# Altium PCB PCB1.PcbDoc
Units mil, origin at the board's own origin, x right, y up, seen from the top; angles counter-clockwise.
Board outline 3937 x 3937 mil, 2 copper layers (Top Layer, Bottom Layer), stack 60.4 mil thick; 14 components, 30 nets, 254 pads, 16 vias.
Unrouted connection lines stored in the file: 73.
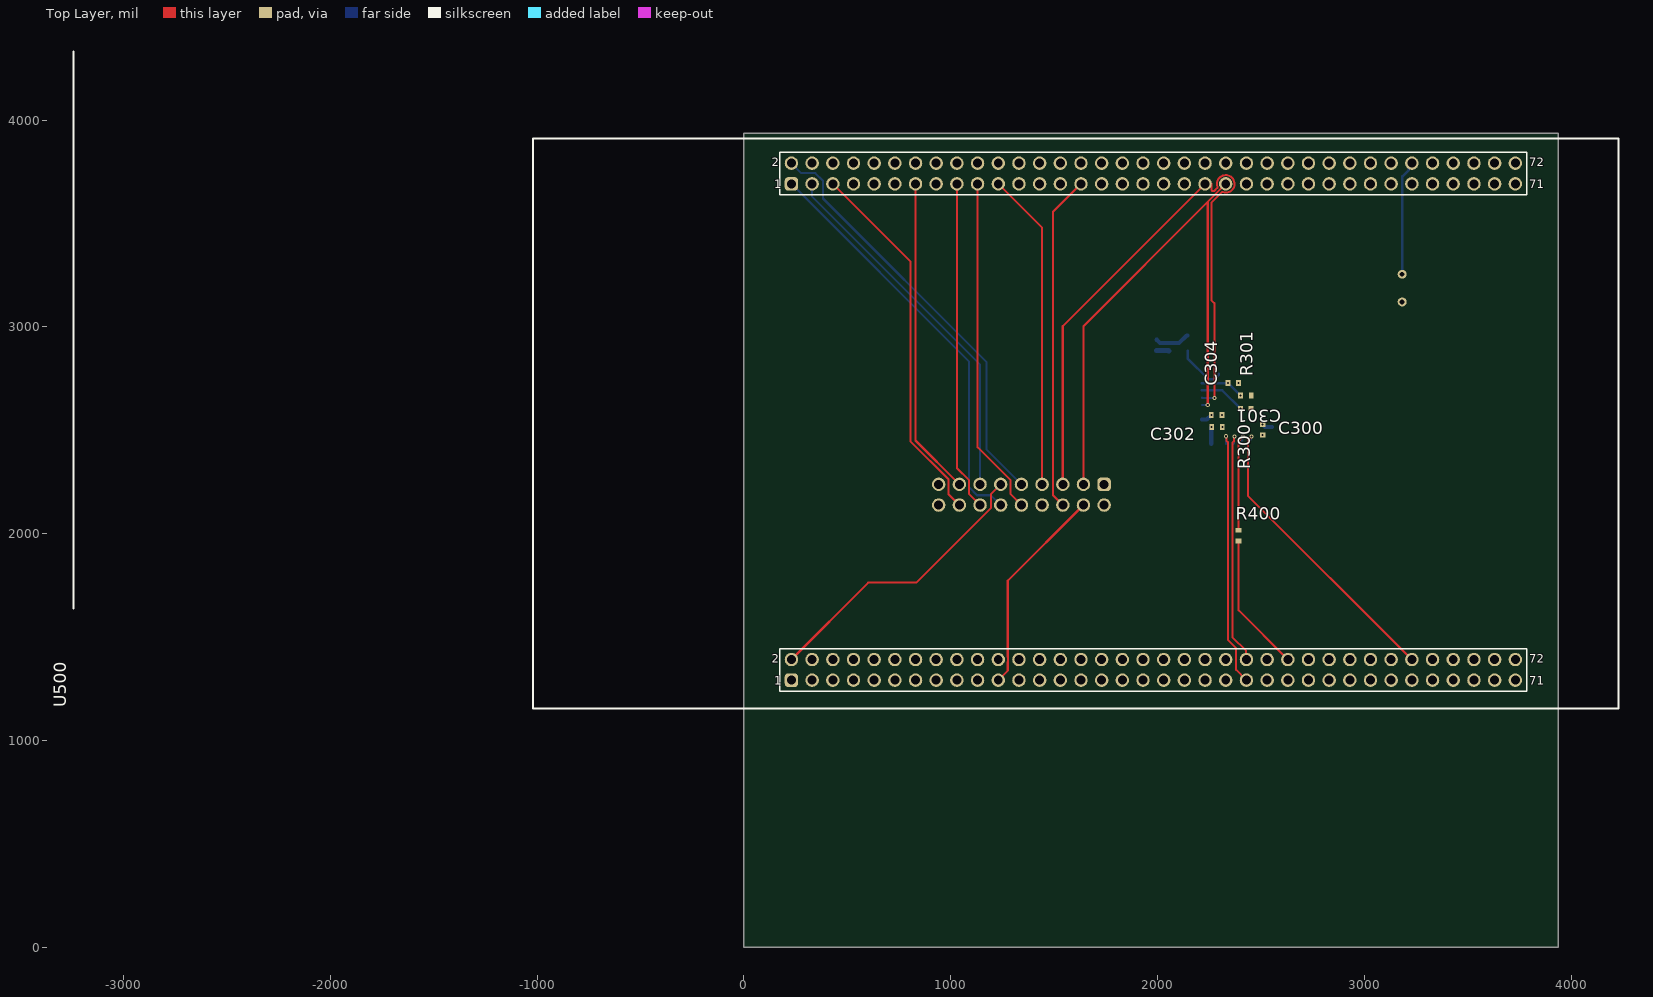
[diagram p0: Top Layer view]
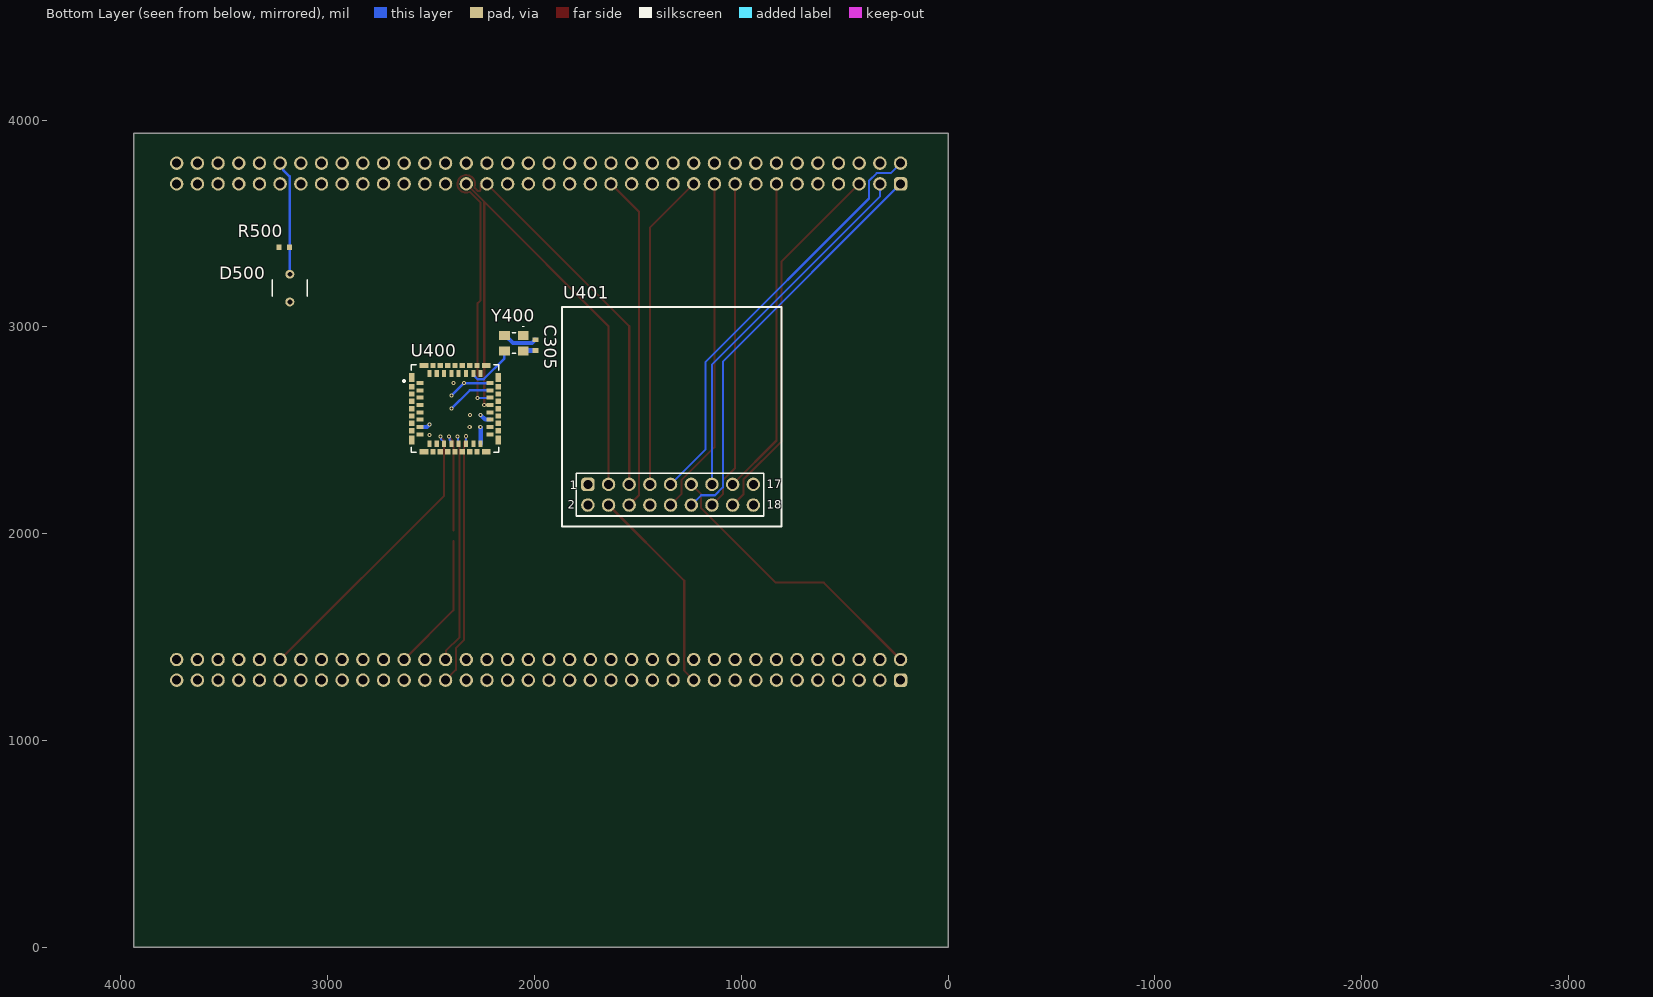
[diagram p1: Bottom Layer view, seen from below]

## Layer stack, top to bottom
Top Solder: solder mask 0.5, Solder Resist, Dk 3.3
Top Layer: signal copper 0.7
Dielectric1: core 59, FR-4, Dk 4.3
Bottom Layer: signal copper 0.7
Bottom Solder: solder mask 0.5, Solder Resist, Dk 3.3

## Board outline
0,0 3937,0 3937,3937 0,3937

## Design rules (kind name [scope] priority, off if disabled: settings)
Clearance [All] p1: gap=5 ignorepadtopadclearanceinfootprint=FALSE
DiffPairsRouting [All] p1: maxlimit=10 minlimit=10 mostfreqgap=10 toplayer_minwidth=10 toplayer_maxwidth=10 toplayer_prefwidth=10 bottomlayer_minwidth=10 bottomlayer_maxwidth=10 bottomlayer_prefwidth=10 maxuncoupledlength=500
HoleSize [All] p1: absolutevalues=TRUE maxlimit=300 minlimit=10 maxpercent=80.000 minpercent=20.000
MinimumAnnularRing [All] p1: minimumring=10
PasteMaskExpansion [All] p1: expansion=10
PlaneClearance [All] p1: clearance=15
PlaneConnect [All] p1: pad.planeconnectstyle=Relief pad.reliefexpansion=20 pad.reliefentries=4 pad.reliefconductorwidth=10 pad.reliefairgap=10 via.planeconnectstyle=Direct via.reliefexpansion=20 via.reliefentries=4 via.reliefconductorwidth=10 via.reliefairgap=10
PolygonConnect [All] p1: thpad.connectstyle=Relief thpad.reliefconductorwidth=10 thpad.reliefentries=4 thpad.polygonreliefangle="90 Angle" thpad.airgapwidth=10 smdpad.connectstyle=Relief smdpad.reliefconductorwidth=10 smdpad.reliefentries=4 smdpad.polygonreliefangle="90 Angle" smdpad.airgapwidth=10 via.connectstyle=Direct via.reliefconductorwidth=10 via.reliefentries=4 via.polygonreliefangle="90 Angle" via.airgapwidth=10
RoutingVias [All] p1: holewidth=10 width=20 viastyle="Through Hole" minholewidth=10 minwidth=20 maxholewidth=10 maxwidth=20
SMDNeckDown [All] p1: percent=100.000
SilkToSolderMaskClearance SilkscreenOverComponentPads [IsPad] p1: minsilkscreentomaskgap=10 clearancetoexposedcopper=TRUE
SolderMaskExpansion [All] p1: expansion=10 istentingtop=FALSE
Width [All] p1: maxlimit=100 minlimit=5 preferedwidth=10 minimp=50.000000 maximp=50.000000 favimp=50.000000
24 further rules are at their usual default settings.

## Classes and differential pairs
component class U_Computation: D500 R500 U500
component class U_Cameras: C300 C301 C302 C304 C305 R300 R301 R400 U400 U401 Y400

## Components (designator, comment, footprint, x,y, rotation, side; value= is the part's Value field where it differs from the comment)
C300 "100nF" 0402_FOOTPRINT 2508.22,2477.31 r90 top
C301 "100nF" 0402_FOOTPRINT 2260.19,2574.1 r0 top
C302 "100nF" 0402_FOOTPRINT 2262.16,2516.41 r0 top
C304 "1uF" 0402_FOOTPRINT 2392,2729 r180 top
C305 "100nF" 0402_FOOTPRINT 1995,2938 r270 bottom
D500 "PDV-P8103" PDVP8103 3183,3255 r0 bottom
R300 "100k" 0402_FOOTPRINT 2401.57,2604.99 r0 top
R301 "10k" 0402_FOOTPRINT 2401.98,2669.04 r0 top
R400 "22.1" 0402_FOOTPRINT 2392,1966 r90 top
R500 "25kOhm" 0402_FOOTPRINT 3235.18,3385 r180 bottom
U400 "Flir_Lepton_connector_1001" 105028-1001 2385,2605 r180 bottom locked
U401 "OV2640_Breakout" OV2640_BREAKOUT 1742,2140.57 r90 bottom locked
U500 "NUCLEO-H755ZI" H7/H5_NUCLEO_SHIELD 230.01,1293.56 r90 top locked
Y400 "ECS-3225MVQ-250-CN-TR" ECS3225MVQ250CNTR 2100,2922 r0 bottom

## Footprints (in the part's own frame and the unit in brackets; to place one, negate y for a bottom-side part, rotate by r counter-clockwise, add the part's x,y. Pads: shape width x height; smd on the part's side, far side on the other; paste and mask are expansions set on the pad)
0402_FOOTPRINT [mm]
  rect 0.6x0.7 smd: 1(0,0) 2(1.3,0)
105028-1001 [mm] "FLIR camera connector form molex"
  rect 0.84x0.5 smd paste+0 mask+0: 1(-4.29,3.15) 2(-4.29,2.25) 3(-4.29,1.35) 4(-4.29,0.45) 5(-4.29,-0.45) 6(-4.29,-1.35) 7(-4.29,-2.25) 8(-4.29,-3.15) 17(4.33,-3.15) 18(4.33,-2.25) 19(4.33,-1.35) 20(4.33,-0.45) 21(4.33,0.45) 22(4.33,1.35) 23(4.33,2.25) 24(4.33,3.15)
  rect 0.5x0.84 smd paste+0 mask+0: 9(-3.13,-4.31) 10(-2.23,-4.31) 11(-1.33,-4.31) 12(-0.43,-4.31) 13(0.47,-4.31) 14(1.37,-4.31) 15(2.27,-4.31) 16(3.17,-4.31) 25(3.17,4.31) 26(2.27,4.31) 27(1.37,4.31) 28(0.47,4.31) 29(-0.43,4.31) 30(-1.33,4.31) 31(-2.23,4.31) 32(-3.13,4.31)
  rect 1.1x0.65 smd paste+0 mask+0: 33(-3.81,5.305) 41(3.85,5.305) 60(-3.81,-5.305) 68(3.85,-5.305)
  rect 0.65x0.65 smd paste+0 mask+0: 34(-2.68,5.305) 35(-1.78,5.305) 36(-0.88,5.305) 37(0.02,5.305) 38(0.92,5.305) 39(1.82,5.305) 40(2.72,5.305) 44(-5.285,2.7) 45(5.325,2.7) 46(-5.285,1.8) 47(5.325,1.8) 48(-5.285,0.9) 49(5.325,0.9) 50(-5.285,0) 51(5.325,0) 52(-5.285,-0.9) 53(5.325,-0.9) 54(-5.285,-1.8) 55(5.325,-1.8) 56(-5.285,-2.7) 57(5.325,-2.7) 61(-2.68,-5.305) 62(-1.78,-5.305) 63(-0.88,-5.305) 64(0.02,-5.305) 65(0.92,-5.305) 66(1.82,-5.305) 67(2.72,-5.305)
  rect 0.65x1.1 smd paste+0 mask+0: 42(-5.285,3.83) 43(5.325,3.83) 58(-5.285,-3.83) 59(5.325,-3.83)
  silkscreen extent -6.38,-5.38 5.4,5.37, body extent -5.46,-5.3 5.32,5.3, height 4.35
ECS3225MVQ250CNTR [mm]
  rect 1.3x1.1 smd: 1(-1.15,-0.95) 2(1.15,-0.95) 3(1.15,0.95) 4(-1.15,0.95)
  silkscreen extent -1.2,-2.1 0.2,1.25, body extent -1.69,-1.39 1.69,1.39, height 1.3
H7/H5_NUCLEO_SHIELD [mm]
  rrect50% 1.65x1.65 hole 1.1: 1(-0.04,0) 73(60.921,0)
  round 1.65 hole 1.1: 2(2.5,0) 3(-0.04,-2.54) 4(2.5,-2.54) 5(-0.04,-5.08) 6(2.5,-5.08) 7(-0.04,-7.62) 8(2.5,-7.62) 9(-0.04,-10.16) 10(2.5,-10.16) 11(-0.04,-12.7) 12(2.5,-12.7) 13(-0.04,-15.24) 14(2.5,-15.24) 15(-0.04,-17.78) 16(2.5,-17.78) 17(-0.04,-20.32) 18(2.5,-20.32) 19(-0.04,-22.86) 20(2.5,-22.86) 21(-0.04,-25.4) 22(2.5,-25.4) 23(-0.04,-27.94) 24(2.5,-27.94) 25(-0.04,-30.48) 26(2.5,-30.48) 27(-0.04,-33.02) 28(2.5,-33.02) 29(-0.04,-35.56) 30(2.5,-35.56) 31(-0.04,-38.1) 32(2.5,-38.1) 33(-0.04,-40.64) 34(2.5,-40.64) 35(-0.04,-43.18) 36(2.5,-43.18) 37(-0.04,-45.72) 38(2.5,-45.72) 39(-0.04,-48.26) 40(2.5,-48.26) 41(-0.04,-50.8) 42(2.5,-50.8) 43(-0.04,-53.34) 44(2.5,-53.34) 45(-0.04,-55.88) 46(2.5,-55.88) 47(-0.04,-58.42) 48(2.5,-58.42) 49(-0.04,-60.96) 50(2.5,-60.96) 51(-0.04,-63.5) 52(2.5,-63.5) 53(-0.04,-66.04) 54(2.5,-66.04) 55(-0.04,-68.58) 56(2.5,-68.58) 57(-0.04,-71.12) 58(2.5,-71.12) 59(-0.04,-73.66) 60(2.5,-73.66) 61(-0.04,-76.2) 62(2.5,-76.2) 63(-0.04,-78.74) 64(2.5,-78.74) 65(-0.04,-81.28) 66(2.5,-81.28) 67(-0.04,-83.82) 68(2.5,-83.82) 69(-0.04,-86.36) 70(2.5,-86.36) 71(-0.04,-88.9) 72(2.5,-88.9) 74(63.46,0) 75(60.921,-2.54) 76(63.46,-2.54) 77(60.92,-5.08) 78(63.46,-5.08) 79(60.92,-7.62) 80(63.46,-7.62) 81(60.92,-10.16) 82(63.46,-10.16) 83(60.92,-12.7) 84(63.46,-12.7) 85(60.92,-15.24) 86(63.46,-15.24) 87(60.92,-17.78) 88(63.46,-17.78) 89(60.92,-20.32) 90(63.46,-20.32) 91(60.92,-22.86) 92(63.46,-22.86) 93(60.92,-25.4) 94(63.46,-25.4) 95(60.92,-27.94) 96(63.46,-27.94) 97(60.92,-30.48) 98(63.46,-30.48) 99(60.92,-33.02) 100(63.46,-33.02) 101(60.92,-35.56) 102(63.46,-35.56) 103(60.92,-38.1) 104(63.46,-38.1) 105(60.92,-40.64) 106(63.46,-40.64) 107(60.92,-43.18) 108(63.46,-43.18) 109(60.92,-45.72) 110(63.46,-45.72) 111(60.92,-48.26) 112(63.46,-48.26) 113(60.92,-50.8) 114(63.46,-50.8) 115(60.92,-53.34) 116(63.46,-53.34) 117(60.92,-55.88) 118(63.46,-55.88) 119(60.92,-58.42) 120(63.46,-58.42) 121(60.92,-60.96) 122(63.46,-60.96) 123(60.92,-63.5) 124(63.46,-63.5) 125(60.92,-66.04) 126(63.46,-66.04) 127(60.92,-68.58) 128(63.46,-68.58) 129(60.92,-71.12) 130(63.46,-71.12) 131(60.92,-73.66) 132(63.46,-73.66) 133(60.92,-76.2) 134(63.46,-76.2) 135(60.92,-78.74) 136(63.46,-78.74) 137(60.92,-81.28) 138(63.46,-81.28) 139(60.92,-83.82) 140(63.46,-83.82) 141(60.92,-86.36) 142(63.46,-86.36) 143(60.92,-88.9) 144(63.46,-88.9)
  silkscreen extent -3.5,-101.6 77.2,88.2, body extent -1.31,-90.17 64.73,1.27, height 8.59
OV2640_BREAKOUT [mm] "Breakout board for camera sensor"
  rrect50% 1.65x1.65 hole 1.1: 1(2.5,0)
  round 1.65 hole 1.1: 2(-0.04,0) 3(2.5,-2.54) 4(-0.04,-2.54) 5(2.5,-5.08) 6(-0.04,-5.08) 7(2.5,-7.62) 8(-0.04,-7.62) 9(2.5,-10.16) 10(-0.04,-10.16) 11(2.5,-12.7) 12(-0.04,-12.7) 13(2.5,-15.24) 14(-0.04,-15.24) 15(2.5,-17.78) 16(-0.04,-17.78) 17(2.5,-20.32) 18(-0.04,-20.32)
  silkscreen extent -2.7,-23.8 24.3,3.2
PDVP8103 [mm]
  round 1.1 hole 0.6: 1(0,0) 2(0,3.4)
  silkscreen extent -2.14,0.7 2.14,2.7, body extent -2.14,-1.43 2.14,4.83, height 2.48

## Part data
C300 C301 C302 C304 C305: library part Capacitor_0402, "0402 capacitor"
D500: "https://www.mouser.lt/ProductDetail/Advanced-Photonix/PDV-P8103?qs=tlsG%2FOw5FFiMv0vIkPUhuA%3D%3D", Manufacturer_Name="ADVANCED PHOTONIX", Datasheet Link=https://media.digikey.com/pdf/Data%20Sheets/Photonic%20Detetectors%20Inc%20PDFs/PDV-P8103.pdf, Height=2.38mm, Manufacturer_Part_Number=PDV-P8103
R300 R301 R400 R500: library part Resistor_0402, "0402 resistor"
U400: "https://cdn.sparkfun.com/assets/f/6/3/4/c/Lepton_Engineering_Datasheet_Rev200.pdf"
U401: "https://www.uctronics.com/download/cam_module/OV2640DS.pdf", ComponentLink1Description="Breakout link", ComponentLink1URL=https://www.duino.lt/index.php?controller=attachment&id_attachment=447
U500: "https://www.st.com/en/evaluation-tools/nucleo-h755zi-q.html#documentation", ComponentLink1Description="Datasheet board", ComponentLink1URL=https://www.st.com/resource/en/user_manual/um2408-stm32h7-nucleo144-boards-mb1363-stmicroelectronics.pdf, ComponentLink2Description=Datasheet, ComponentLink2URL=https://www.google.com/url?sa=t&rct=j&q=&esrc=s&source=web&cd=&cad=rja&uact=8&ved=2ahUKEwiL2Oj0qt6BAxVAgv0HHcIABWcQFnoECAkQAQ&url=https%3A%2F%2Fwww.st.com%2Fresource%2Fen%2Fdatasheet%2Fstm32h755bi.pdf&usg=AOvVaw10mo3FsD-TXgt8LL4QIrqK&opi=89978449
Y400: "https://www.mouser.lt/ProductDetail/ECS/ECS-3225MVQ-250-CN-TR?qs=GedFDFLaBXEiQ79b6FnYAg%3D%3D", Manufacturer_Name=ECS, Mouser Part Number=520-3225MVQ-250-CN-T, Arrow Part Number=ECS-3225MVQ-250-CN-TR, Arrow Price/Stock=https://www.arrow.com/en/products/ecs-3225mvq-250-cn-tr/ecs-international?region=nac, Datasheet Link=https://www.mouser.com/datasheet/2/122/ECS-3225MVQ-1825332.pdf, Height=1.2mm, Manufacturer_Part_Number=ECS-3225MVQ-250-CN-TR, Mouser Price/Stock=https://www.mouser.co.uk/ProductDetail/ECS/ECS-3225MVQ-250-CN-TR?qs=GedFDFLaBXEiQ79b6FnYAg%3D%3D

## Via types
v1: diameter 20, hole 10, Top Layer to Bottom Layer, 16 vias

## Nets (pads, with @x,y where several pads share a name; then routed paths per layer and width w, separated by ;. In a path a pad name is that pad's centre, name@x,y a point inside that pad or via, vN(x,y) a via of type N, cw(c..) or ccw(c..) an arc to the next point about the centre after c; other vN are vias at no path point)
1V2: C300.2 U400.7 | length 50.6
  Bottom Layer w20: v1(2508.32,2528.59) 2520.35,2516.56 2553.73,2516.56 U400.7
2V8: C301.1 C305.2 U400.19 Y400.1 Y400.4 | length 116.9
  Bottom Layer w20: U400.19 2214.68,2552 2238.08,2552 v1(2261.17,2575.08)
  Bottom Layer w25: C305.2 1995.69,2886.13 2053.19,2886.13 Y400.4
3V0: C302.1 R300.2 R301.2 U400.16 | length 81.9
  Bottom Layer w20: U400.16 2260.19,2514.44 v1(2262.16,2516.41)
3V3: D500.2 U401.2
ADC_LIGHT_SENSOR: D500.1 R500.2 U500.134 | length 556.5
  Bottom Layer w12: D500.1 3183.5,3255.5 3183.5,3384.5 R500.2 3184,3728 3215.31,3759.31 3215.31,3762.95 3230.01,3777.66 U500.134
GND: C300.1 C301.2 C302.2 C304.1 C305.1 R500.1 U400.1 U400.6 U400.8 U400.9 U400.10 U400.15 U400.18 U400.20 U400.25 U400.27 U400.30 U400.33 U400.34 U400.35 U400.36 U400.37 U400.38 U400.39 U400.40 U400.41 U400.42 U400.43 U400.44 U400.45 U400.46 U400.47 U400.48 U400.49 U400.50 U400.51 U400.52 U400.53 U400.54 U400.55 U400.56 U400.57 U400.58 U400.59 U400.60 U400.61 U400.62 U400.63 U400.64 U400.65 U400.66 U400.67 U400.68 U401.1 U401.18 U500.8 U500.19 U500.20 U500.22 U500.49 U500.60 U500.81 U500.92 U500.111 U500.126 U500.135 Y400.2 | length 171.8
  Bottom Layer w20: C305.1 1996.97,2938 2012.22,2922.75 2104.68,2922.75 2141.34,2959.4 Y400.2
  other v1: 2508.22,2477.31 2313.34,2516.41 2311.37,2574.1 2392,2729
LEPTON.PWR: R300.1 U400.23 | length 223.7
  Bottom Layer w12: U400.23 2312.98,2693.57 v1(2401.57,2604.99)
LEPTON.RESET: C304.2 R301.1 U400.24 | length 211.9
  Bottom Layer w12: U400.24 2341.21,2729 2401.17,2669.04 v1(2401.57,2669.04)
  other v1: 2340.82,2729
LEPTON.SCL: U400.21 U401.3 U500.115 | length 2748.6
  Top Layer w10: U401.3 1642,3004 2242.9,3604.9 ; v1(2242.9,2622.71) 2242.9,3604.9 ; U500.115 2242.9,3604.9
  Bottom Layer w10: U400.21 v1(2242.9,2622.71)
LEPTON.SDA: U400.22 U401.5 U500.113 | length 3165
  Top Layer w10: U401.5 1542,3004 U500.113 2237.56,3699.56 2254.33,3699.56 2260.19,3693.7 2260.19,3663.4 2266.05,3657.54 2274.33,3657.54 2289.69,3672.91 2289.69,3677.05 2289.69,3678.58 cw(c2330,3692) 2316.58,3651.69 2315.05,3651.69 2310.91,3651.69 2260.19,3600.97 2260.19,3129.35 2274.78,3114.76 v1(2274.78,2656.02)
  Bottom Layer w10: U400.22 2215.58,2657.08 2273.72,2657.08 v1(2274.78,2656.02)
LEPTON.SPI_CLK: U400.13 U500.46 | length 1146.4
  Top Layer w10: v1(2372,2469.57) 2370.09,2467.65 2370.09,2447.65 2362,2439.57 2362,1500.28 2428.67,1433.61 2428.67,1393.34 U500.46
  Bottom Layer w10: U400.13 2370.09,2438.9 2370.09,2467.65 v1(2372,2469.57)
LEPTON.SPI_CS: U400.14 U500.45 | length 1256.7
  Top Layer w10: v1(2331.25,2471.48) 2333.17,2469.57 2333.17,2449.53 2341.21,2441.48 2341.21,1485.79 2380,1447 2380,1342 U500.45
  Bottom Layer w10: U400.14 2331.15,2435.4 2331.15,2471.38 v1(2331.25,2471.48)
LEPTON.SPI_MISO: R400.1 U500.50 | length 672.6
  Top Layer w10: R400.1 2392,1630 U500.50
LEPTON.SPI_MOSI: U400.11 U500.62 | length 1454.9
  Top Layer w10: v1(2455.07,2469.57) 2437.35,2451.85 2437.35,2184.65 U500.62
  Bottom Layer w10: U400.11 2437.35,2442 2453.16,2457.8 2453.16,2467.65 v1(2455.07,2469.57)
LEPTON.VSYNC: U400.2
LEPTON_CLK: U400.26 Y400.3 | length 244.3
  Bottom Layer w12: Y400.3 2145.28,2847.65 2245.79,2747.14 2274.78,2747.14 2295.62,2767.98 U400.26
NetR400_2: R400.2 U400.12 | length 500.4
  Top Layer w10: R400.2@2392,2017 2392,2448.4 2413.17,2469.57 v1(2413.26,2469.57)
  Bottom Layer w10: U400.12 2406.76,2440.15 2406.76,2451.33 2411.35,2455.91 2411.35,2467.65 v1(2413.26,2469.57)
OV.D0: U401.7 U500.76 U500.93 | length 1540.8
  Top Layer w10: U500.93 1442,3480 U401.7
OV.D1: U401.10 U500.91 U500.105 | length 1640.8
  Top Layer w10: U500.91 1130,2418.15 1289.48,2258.67 1289.48,2191.52 U401.10
OV.D2: U401.9 U500.74 U500.136 | length 2052.9
  Bottom Layer w10: U500.74 277.93,3744.07 345.12,3744.07 382.52,3706.67 382.52,3621.48 1174,2830 1174,2407 U401.9
OV.D3: U401.12 U500.73 | length 2011.5
  Bottom Layer w10: U500.73 1089.48,2832.56 1089.48,2224.37 1127.37,2186.48 1194.52,2186.48 U401.12
OV.D4: U401.11 U500.2 | length 1402.2
  Top Layer w10: U500.2 601.47,1763.44 833.59,1763.44 1194.52,2124.37 1194.52,2191.52 U401.11
OV.D5: U401.14 U500.89 | length 1599.4
  Top Layer w10: U500.89 1030,2318.15 1089.48,2258.67 1089.48,2191.52 U401.14
OV.D6: U401.13 U500.75 | length 1789.4
  Bottom Layer w10: U500.75 330.01,3629.99 1142,2818 U401.13
OV.D7: U401.16 U500.77 | length 1806.5
  Top Layer w10: U500.77 805,3317 805,2447.72 989.48,2263.24 989.48,2191.52 U401.16
OV.DCLK: U401.15 U500.85 | length 1540.8
  Top Layer w10: U500.85 830,2451 U401.15
OV.HREF: U401.6 U500.101 | length 1628.8
  Top Layer w10: U401.6 1494.52,2186.48 1494.52,3556.52 U500.101
OV.PWDN: U401.17
OV.RST: U401.8
OV.VSYNC: U401.4 U500.21 | length 1017.9
  Top Layer w10: U500.21 1275.96,1337.93 1275.96,1380.01 ccw(c1230.01,1391.99) 1275.96,1403.96 1275.96,1772.96 U401.4
pads on no net: U400.3 U400.4 U400.5 U400.17 U400.28 U400.29 U400.31 U400.32 U500.1 U500.3 U500.4 U500.5 U500.6 U500.7 U500.9 U500.10 U500.11 U500.12 U500.13 U500.14 U500.15 U500.16 U500.17 U500.18 U500.23 U500.24 U500.25 U500.26 U500.27 U500.28 U500.29 U500.30 U500.31 U500.32 U500.33 U500.34 U500.35 U500.36 U500.37 U500.38 U500.39 U500.40 U500.41 U500.42 U500.43 U500.44 U500.47 U500.48 U500.51 U500.52 U500.53 U500.54 U500.55 U500.56 U500.57 U500.58 U500.59 U500.61 U500.63 U500.64 U500.65 U500.66 U500.67 U500.68 U500.69 U500.70 U500.71 U500.72 U500.78 U500.79 U500.80 U500.82 U500.83 U500.84 U500.86 U500.87 U500.88 U500.90 U500.94 U500.95 U500.96 U500.97 U500.98 U500.99 U500.100 U500.102 U500.103 U500.104 U500.106 U500.107 U500.108 U500.109 U500.110 U500.112 U500.114 U500.116 U500.117 U500.118 U500.119 U500.120 U500.121 U500.122 U500.123 U500.124 U500.125 U500.127 U500.128 U500.129 U500.130 U500.131 U500.132 U500.133 U500.137 U500.138 U500.139 U500.140 U500.141 U500.142 U500.143 U500.144

## Text inside footprints (layer, text, board x,y; h text height)
U401: Bottom Overlay "18" at 875.86,2120.89 h40; Bottom Overlay "17" at 875.86,2219.31 h40; Bottom Overlay "1" at 1828.61,2215.38 h40; Bottom Overlay "2" at 1840.42,2120.89 h40
U500: Top Overlay "71" at 3798.12,1271.12 h40; Top Overlay "72" at 3798.12,1377.42 h40; Top Overlay "1" at 146.16,1271.12 h40; Top Overlay "2" at 134.35,1377.42 h40; Top Overlay "1" at 146.16,3671.12 h40; Top Overlay "72" at 3798.12,3777.42 h40; Top Overlay "2" at 134.35,3777.42 h40; Top Overlay "71" at 3798.12,3671.12 h40